# EAGLE board Remade (EAGLE 9.1.2)
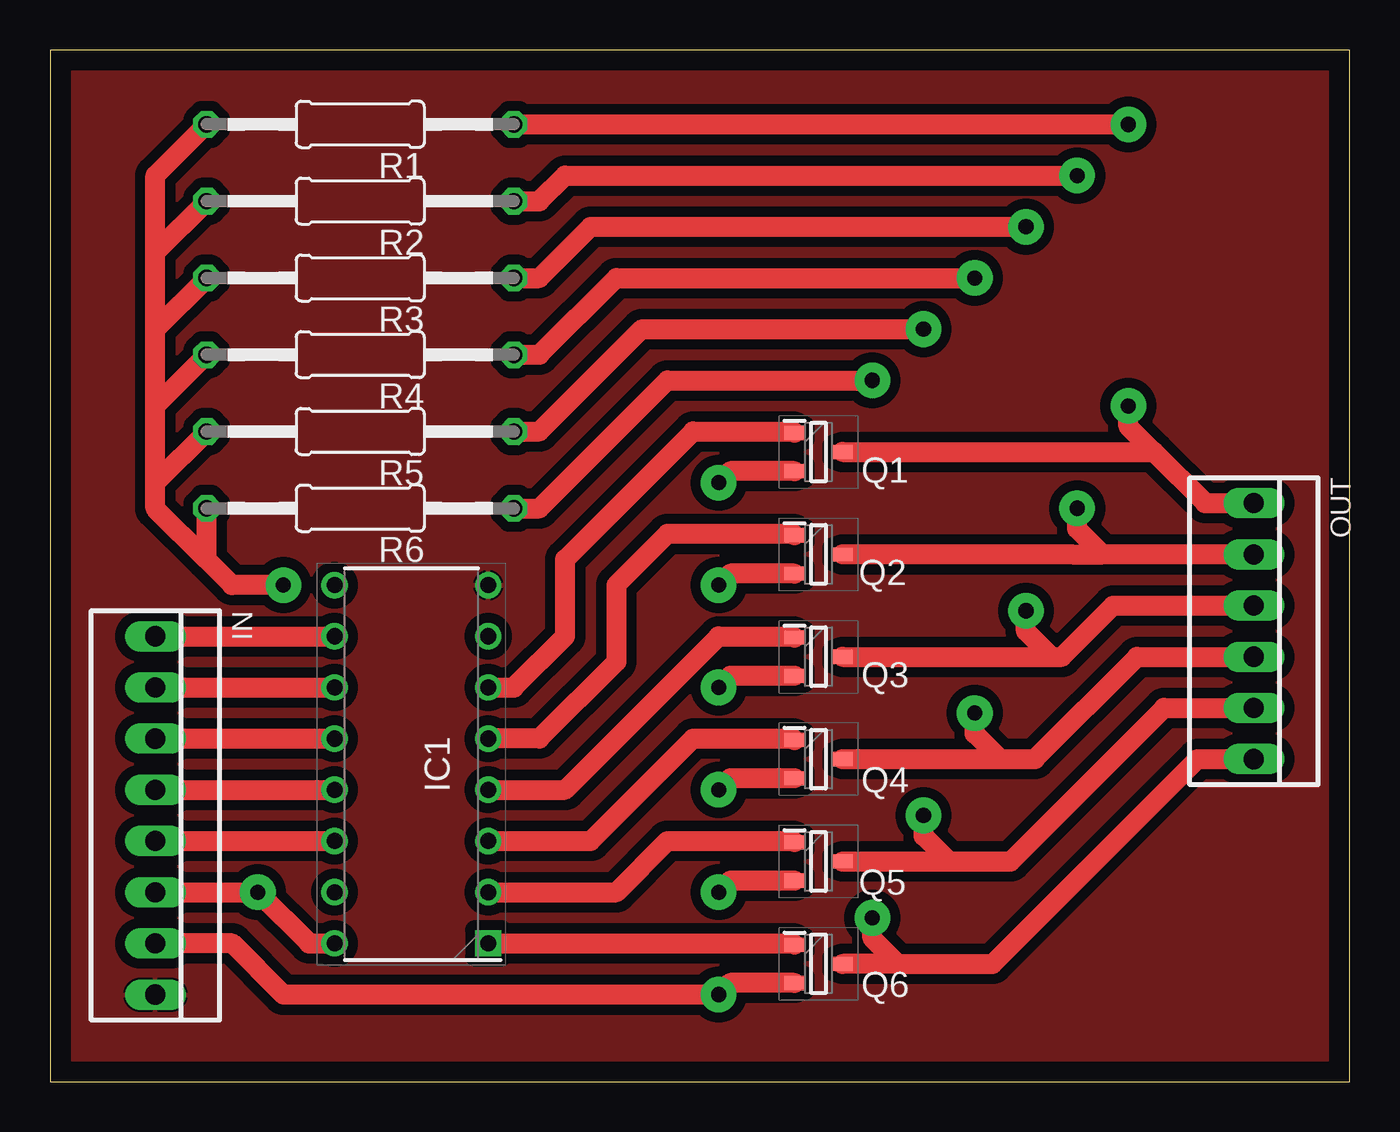
[diagram p0: board, top side]
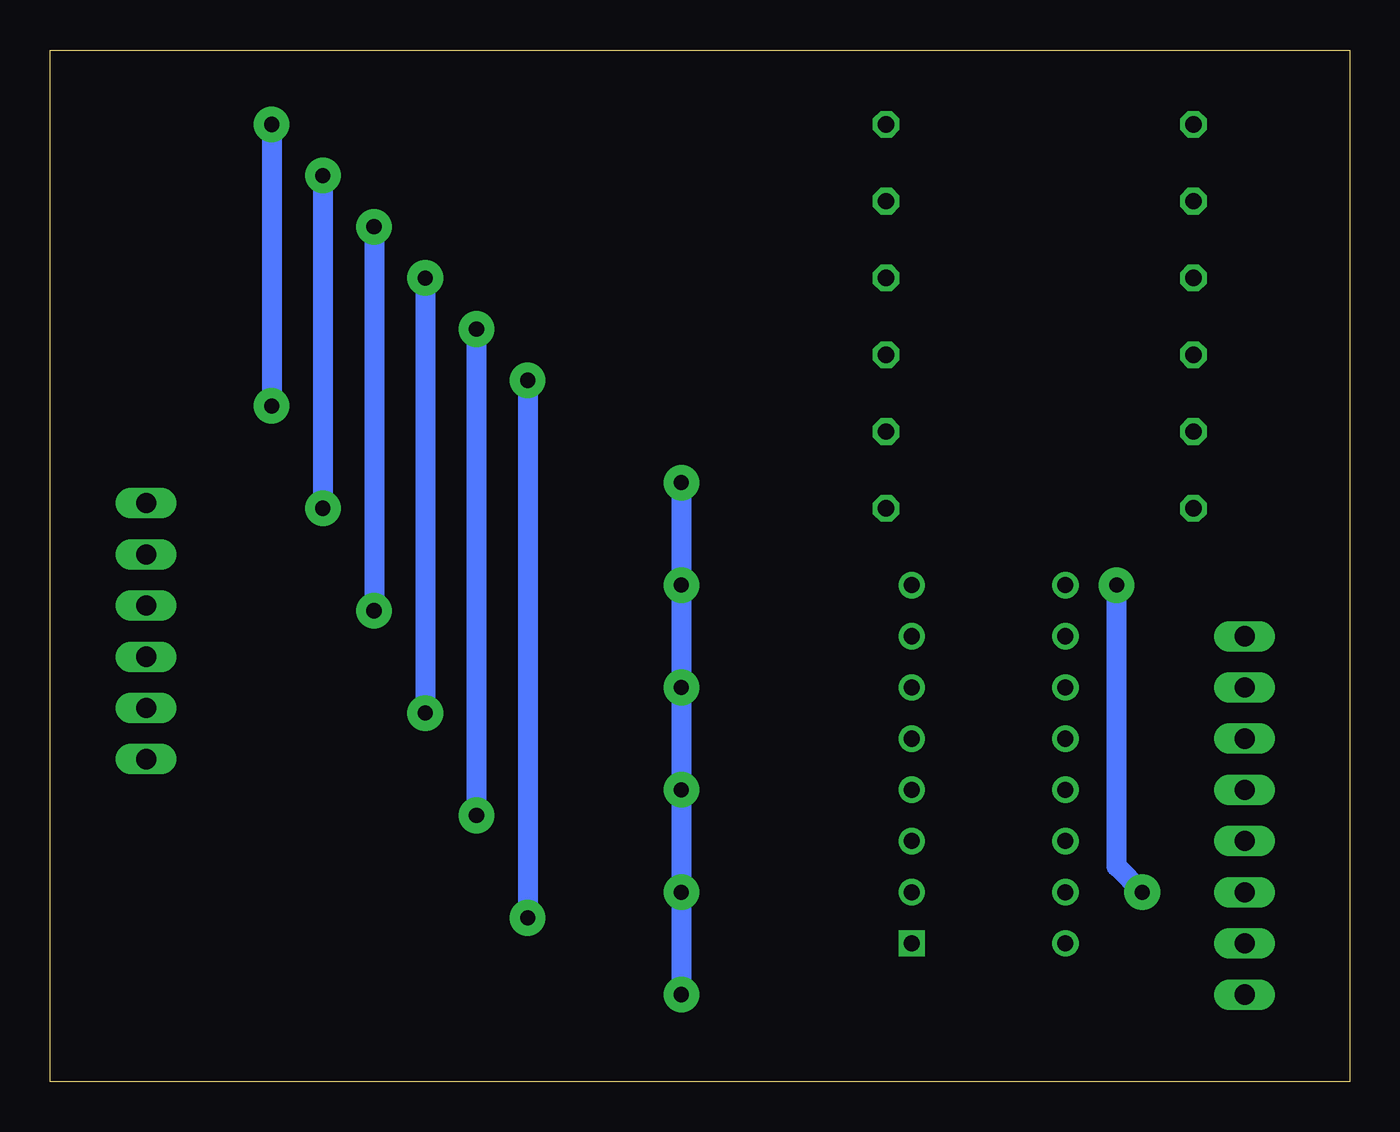
[diagram p1: board, bottom side, seen from below]

Size 64.44 x 51.17 mm. Coordinates in mm from the lower left corner, seen from the top.
Outline: 0,0 64.44,0 64.44,51.17 0,51.17 0,0
Copper layers (1*16): Top 0.035mm / dielectric 1.5mm / Bottom 0.035mm
Design rules "default *": minimum track width 6mil, minimum drill 0.5mm, track to track 0.5mm, track to pad 0.4mm, pad to pad 0.4mm, via to via 0.4mm, smd to smd 6mil, copper to edge 40mil, drill to drill 6mil, minimum pad ring 10mil, minimum via ring 8mil, stop-mask expansion 4mil, vias tented up to drill 0mil, thermal gap 0.1mm
Net classes: 0 default: clearance 0.25 mm

## Footprints (pad centres in the part's own frame; a part is rotated, then mirrored left to right if it is on the bottom)
DIP762W60P254L1925H445Q16N = drill 0.8 pad 1.2 square: 1 -3.81,8.89 | drill 0.8 pad 1.2: 2 -3.81,6.35; 3 -3.81,3.81; 4 -3.81,1.27; 5 -3.81,-1.27; 6 -3.81,-3.81; 7 -3.81,-6.35; 8 -3.81,-8.89; 9 3.81,-8.89; 10 3.81,-6.35; 11 3.81,-3.81; 12 3.81,-1.27; 13 3.81,1.27; 14 3.81,3.81; 15 3.81,6.35; 16 3.81,8.89
22-23-2081 = drill 1 long: 1 -8.89,0; 2 -6.35,0; 3 -3.81,0; 4 -1.27,0; 5 1.27,0; 6 3.81,0; 7 6.35,0; 8 8.89,0
22-23-2061 = drill 1 long: 1 -6.35,0; 2 -3.81,0; 3 -1.27,0; 4 1.27,0; 5 3.81,0; 6 6.35,0
SOT95P240X120-3N = smd 1 x 0.7: 1 -1.2,0.95; 2 -1.2,-0.95; 3 1.2,0
0207/15 = drill 0.813 octagon: 1 -7.62,0; 2 7.62,0

## Placement (x,y rotation side)
IC1  TC74HC595AP(F)  [DIP762W60P254L1925H445Q16N]  17.91,15.75 180 top
IN  22-23-2081  [22-23-2081]  5.21,13.21 270 top
OUT  [22-23-2061]  59.69,22.35 270 top
Q1  BSS138  [SOT95P240X120-3N]  38.1,31.24 0 top
Q2  BSS138  [SOT95P240X120-3N]  38.1,26.16 0 top
Q3  BSS138  [SOT95P240X120-3N]  38.1,21.08 0 top
Q4  BSS138  [SOT95P240X120-3N]  38.1,16 0 top
Q5  BSS138  [SOT95P240X120-3N]  38.1,10.92 0 top
Q6  BSS138  [SOT95P240X120-3N]  38.1,5.84 0 top
R1  2.2k  [0207/15]  15.37,47.5 180 top
R2  2.2k  [0207/15]  15.37,43.69 180 top
R3  2.2k  [0207/15]  15.37,39.88 180 top
R4  2.2k  [0207/15]  15.37,36.07 180 top
R5  2.2k  [0207/15]  15.37,32.26 180 top
R6  2.2k  [0207/15]  15.37,28.45 180 top

## Library data of the parts
IC1 = TC74HC595AP(F); DESCRIPTION: IC,CMOS logic,DIP16,SHIFT REGISTERS; HEIGHT: 4.45mm; MANUFACTURER_NAME: Toshiba; MANUFACTURER_PART_NUMBER: TC74HC595AP(F); MOUSER_PART_NUMBER: N/A; MOUSER_PRICE-STOCK: https://www.mouser.com/Search/Refine.aspx?Keyword=N%2FA; RS_PART_NUMBER: 5400095P; RS_PRICE-STOCK: http://au.rs-online.com/web/p/products/5400095P
IN = con-molex; MF: MOLEX; MPN: 22-23-2081; OC_FARNELL: 1756826; OC_NEWARK: 01C7592
OUT = con-molex; MF: MOLEX; MPN: 22-23-2061; OC_FARNELL: 1462922; OC_NEWARK: 27C1933
Q1-Q6 = BSS138; DESCRIPTION: N-channel MOSFET,BSS138 0.2A 50V; HEIGHT: 1.2mm; MANUFACTURER_NAME: ON Semiconductor; MANUFACTURER_PART_NUMBER: BSS138; MOUSER_PART_NUMBER: 512-BSS138; RS_PART_NUMBER: 1241694; RS_PRICE-STOCK: http://uk.rs-online.com/web/p/products/1241694
R1-R6 = rcl; SPICEPREFIX: R

## Nets
!G: IC1.13 IN.4
!SCLR: IC1.10 IN.1
GND: IC1.8 IN.8
OUT1: OUT.1 Q1.3 R1.1
OUT2: OUT.2 Q2.3 R2.1
OUT3: OUT.3 Q3.3 R3.1
OUT4: OUT.4 Q4.3 R4.1
OUT5: OUT.5 Q5.3 R5.1
OUT6: OUT.6 Q6.3 R6.1
QB: IC1.1 Q6.1
QC: IC1.2 Q5.1
QD: IC1.3 Q4.1
QE: IC1.4 Q3.1
QF: IC1.5 Q2.1
QG: IC1.6 Q1.1
RCK: IC1.12 IN.3
SCK: IC1.11 IN.2
SDA: IN.7 Q1.2 Q2.2 Q3.2 Q4.2 Q5.2 Q6.2
SI: IC1.14 IN.5
VCC: IC1.16 IN.6 R1.2 R2.2 R3.2 R4.2 R5.2 R6.2

## Tracks (layer width: path | path; a pad name or v marks a point on that pad's centre or on a via)
!G
  Top 1: IN.4 IC1.13
!SCLR
  Top 1: IN.1 IC1.10
GND
  pour Top: -1.14,51.31 -1.14,-4.57 0.13,-5.84 67.44,-5.84 69.98,-3.3 69.98,51.31
OUT1  (via drill 0.75)
  Top 1: R1.1 v53.47,47.5 | OUT.1 57.28,28.7 54.74,31.24 | v53.47,33.53 53.47,32.51 54.74,31.24 | Q1.3 54.74,31.24
  Bottom 1: v53.47,47.5 v53.47,33.53
OUT2  (via drill 0.75)
  Top 1: R2.1 24.26,43.69 25.53,44.96 v50.93,44.96 | v50.93,28.45 50.93,27.43 52.2,26.16 | 52.2,26.16 50.67,26.16 Q2.3 | OUT.2 52.2,26.16
  Bottom 1: v50.93,44.96 v50.93,28.45
OUT3  (via drill 0.75)
  Top 1: R3.1 24.26,39.88 26.8,42.42 v48.39,42.42 | Q3.3 49.66,21.08 | 49.66,21.08 50.16,21.08 52.7,23.62 OUT.3 | 49.66,21.08 48.39,22.35 v48.39,23.37
  Bottom 1: v48.39,42.42 v48.39,23.37
OUT4  (via drill 0.75)
  Top 1: R4.1 24.26,36.07 28.07,39.88 v45.85,39.88 | OUT.4 53.91,21.08 48.83,16 47.12,16 | Q4.3 40.77,16 47.12,16 | 47.12,16 45.85,17.27 v45.85,18.29
  Bottom 1: v45.85,39.88 v45.85,18.29
OUT5  (via drill 0.75)
  Top 1: R5.1 24.26,32.26 29.34,37.34 v43.31,37.34 | OUT.5 55.25,18.54 47.62,10.92 44.58,10.92 | Q5.3 44.58,10.92 | 44.58,10.92 43.31,12.19 v43.31,13.21
  Bottom 1: v43.31,37.34 v43.31,13.21
OUT6  (via drill 0.75)
  Top 1: R6.1 24.26,28.45 30.61,34.8 v40.77,34.8 | 42.04,5.84 46.74,5.84 56.9,16 OUT.6 | 42.04,5.84 40.77,7.11 v40.77,8.13 | 42.04,5.84 Q6.3
  Bottom 1: v40.77,34.8 v40.77,8.13
QB
  Top 1: IC1.1 36.83,6.86 Q6.1
QC
  Top 1: IC1.2 28.07,9.4 30.61,11.94 36.83,11.94 Q5.1
QD
  Top 1: IC1.3 26.8,11.94 31.88,17.02 36.83,17.02 Q4.1
QE
  Top 1: IC1.4 25.53,14.48 33.15,22.1 36.83,22.1 Q3.1
QF
  Top 1: IC1.5 24.26,17.02 28.07,20.83 28.07,24.64 30.61,27.18 31.88,27.18 36.83,27.18 Q2.1
QG
  Top 1: Q1.1 36.83,32.26 31.88,32.26 25.53,25.91 25.53,22.1 22.99,19.56 IC1.6
RCK
  Top 1: IN.3 IC1.12
SCK
  Top 1: IN.2 IC1.11
SDA  (via drill 0.75)
  Top 1: Q1.2 33.72,30.29 v33.15,29.72 | Q2.2 33.72,25.21 v33.15,24.64 | Q3.2 33.72,20.13 v33.15,19.56 | Q4.2 33.72,15.05 v33.15,14.48 | Q5.2 33.72,9.97 v33.15,9.4 | Q6.2 33.72,4.89 v33.15,4.32 11.56,4.32 9.02,6.86 IN.7
  Bottom 1: v33.15,29.72 v33.15,24.64 v33.15,19.56 v33.15,14.48 v33.15,9.4 v33.15,4.32
SI
  Top 1: IN.5 IC1.14
VCC  (via drill 0.75)
  Top 1: IN.6 v10.29,9.4 12.83,6.86 IC1.16 | R6.2 7.75,27.18 7.75,25.91 | 7.75,25.91 9.02,24.64 v11.56,24.64 | 5.21,29.72 5.21,28.45 7.75,25.91 | 5.21,29.72 5.21,33.53 | 5.21,33.53 5.21,37.34 | 5.21,37.34 5.21,41.15 | 5.21,41.15 5.21,44.96 R1.2 | R2.2 5.21,41.15 | R3.2 5.21,37.34 | R4.2 5.21,33.53 | R5.2 5.21,29.72
  Bottom 1: v11.56,24.64 11.56,10.67 v10.29,9.4